# Altium PCB PCB01072018.PcbDoc
Units mm, origin at the board's own origin, x right, y up, seen from the top; angles counter-clockwise.
Board outline 50 x 30 mm, 4 copper layers (Top Layer, GND, VCC, Bottom Layer), stack 0.651 mm thick; 46 components, 32 nets, 228 pads, 48 vias.
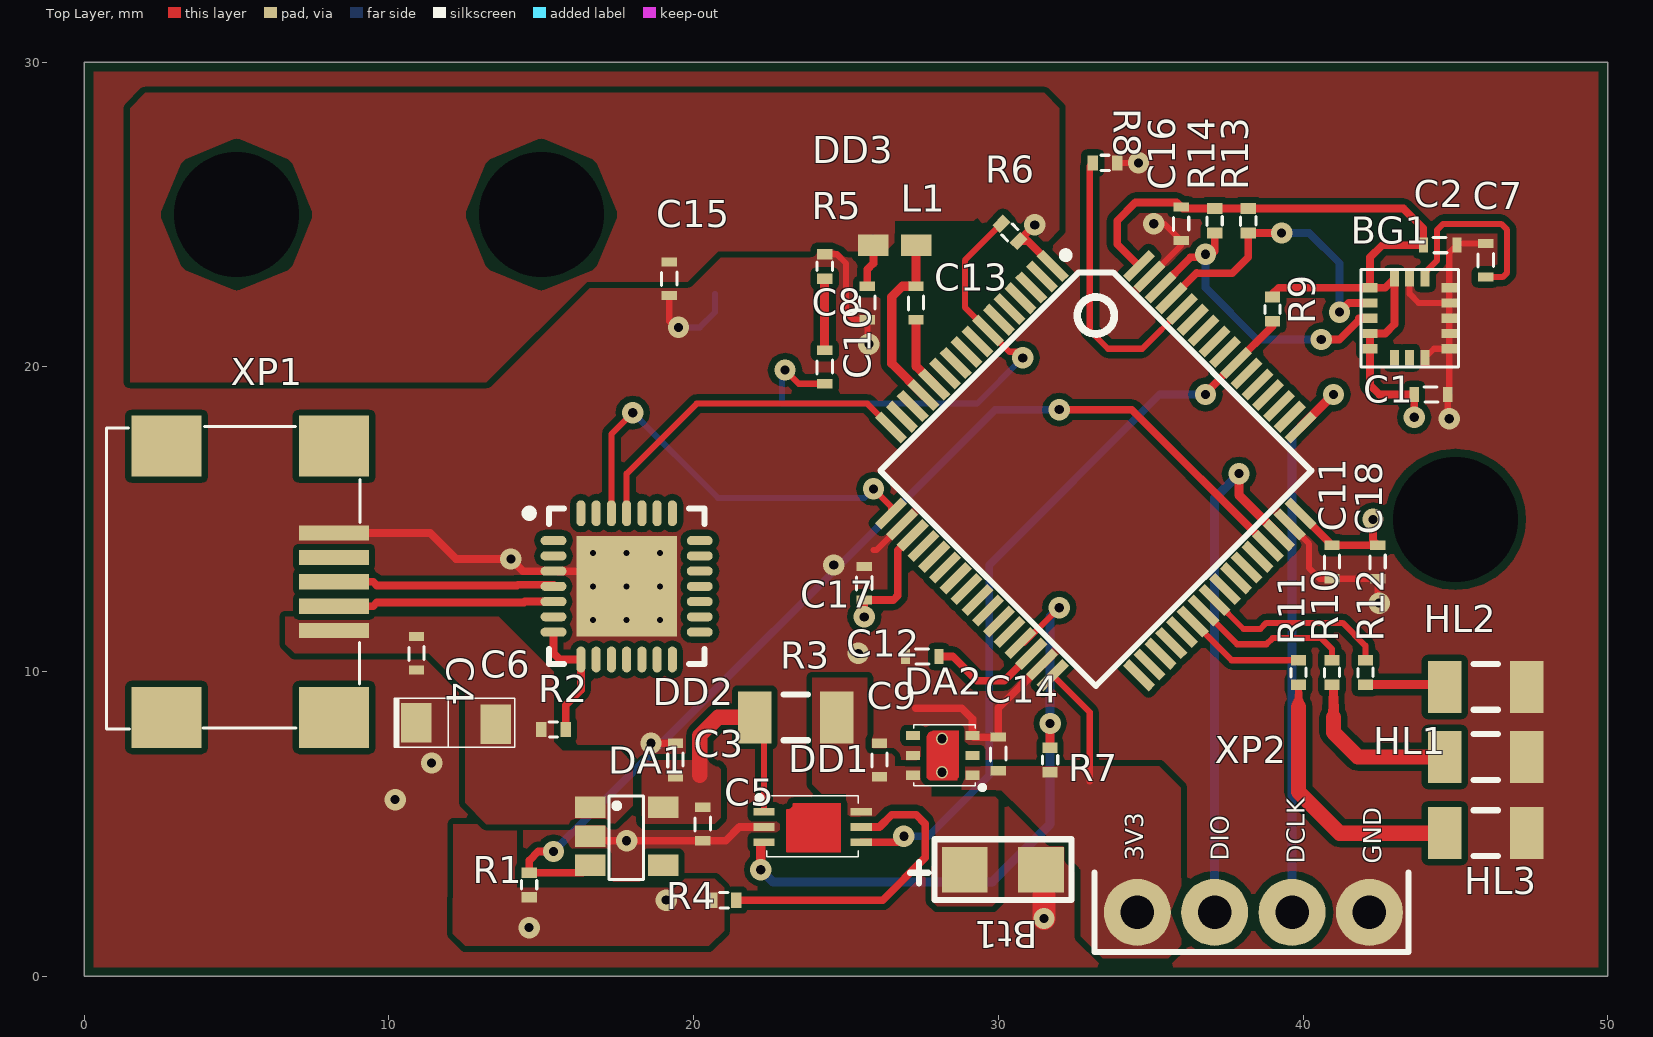
[diagram p0: Top Layer view]
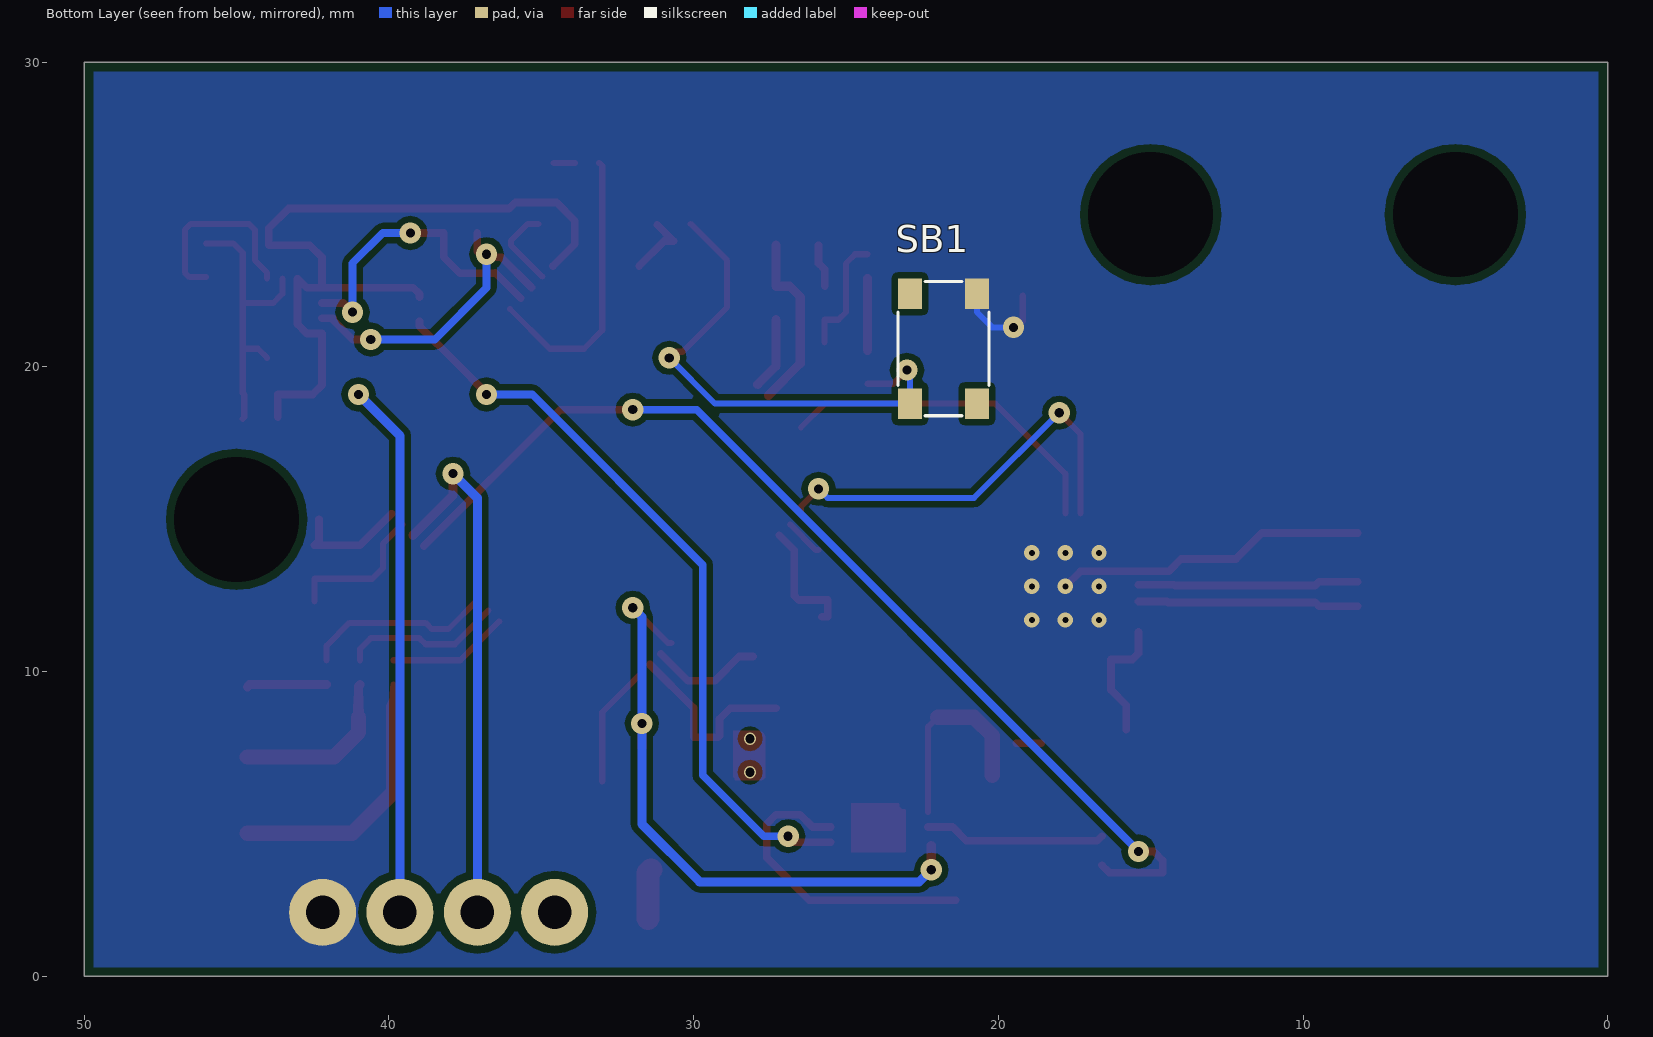
[diagram p1: Bottom Layer view, seen from below]
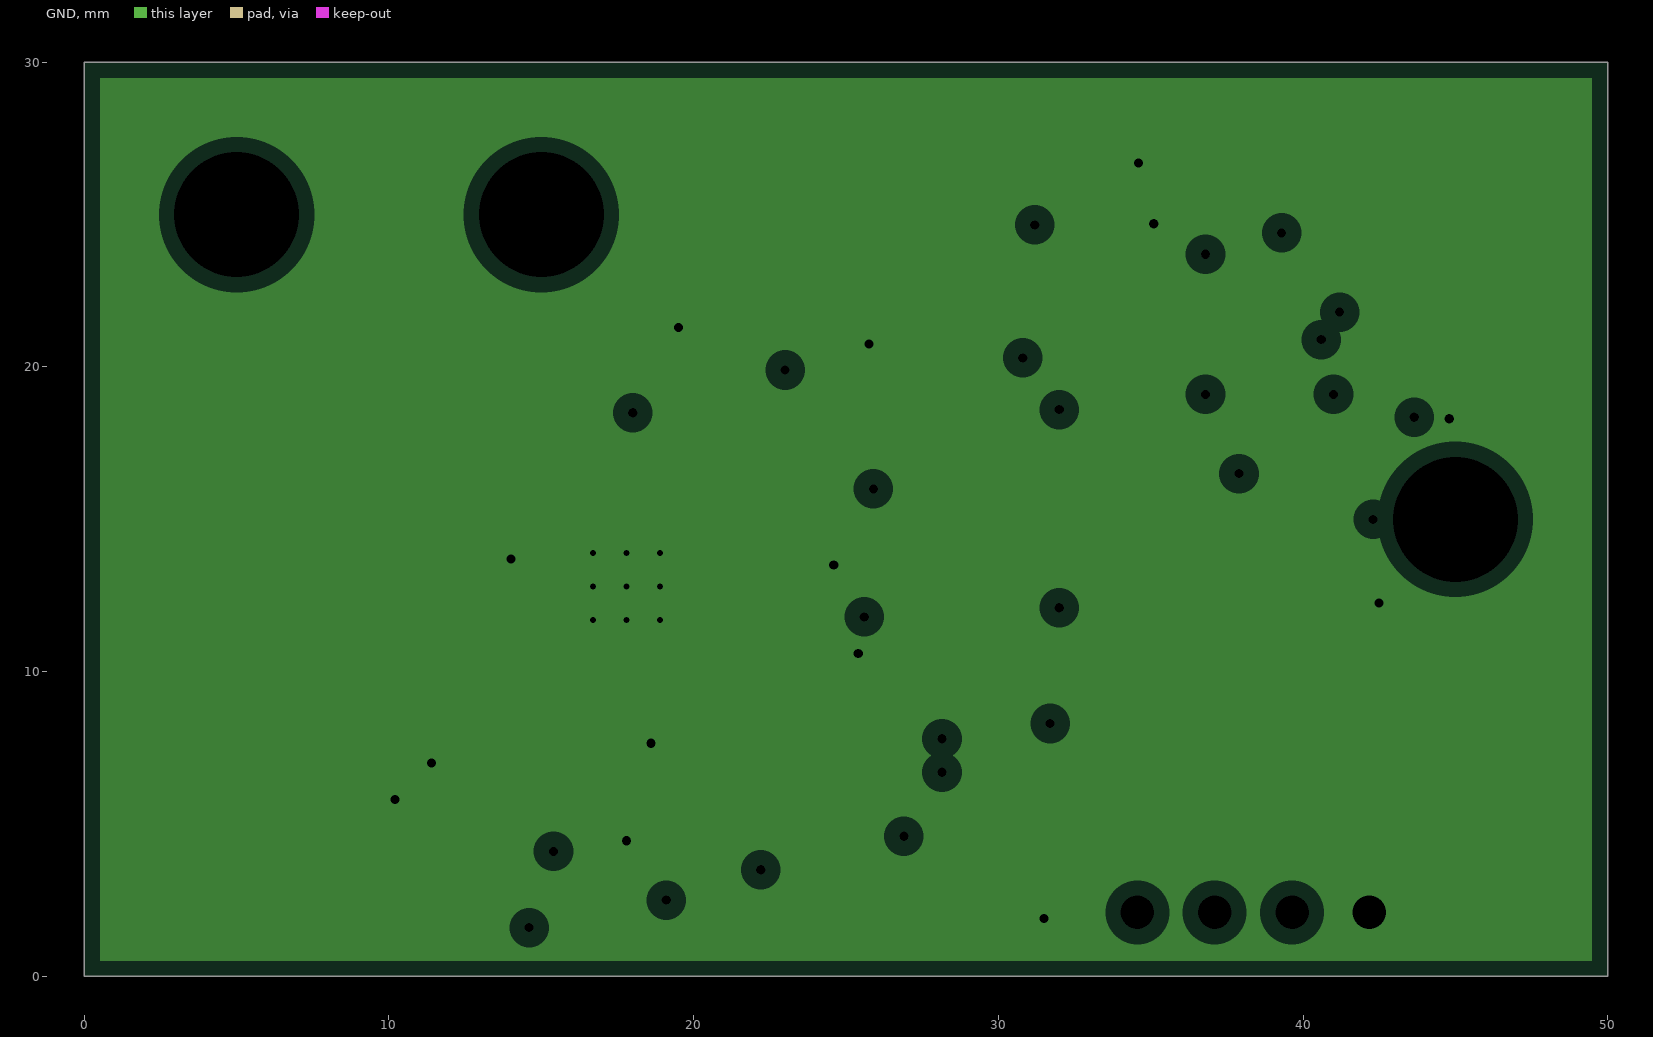
[diagram p2: GND, clearances drawn from the general rule]
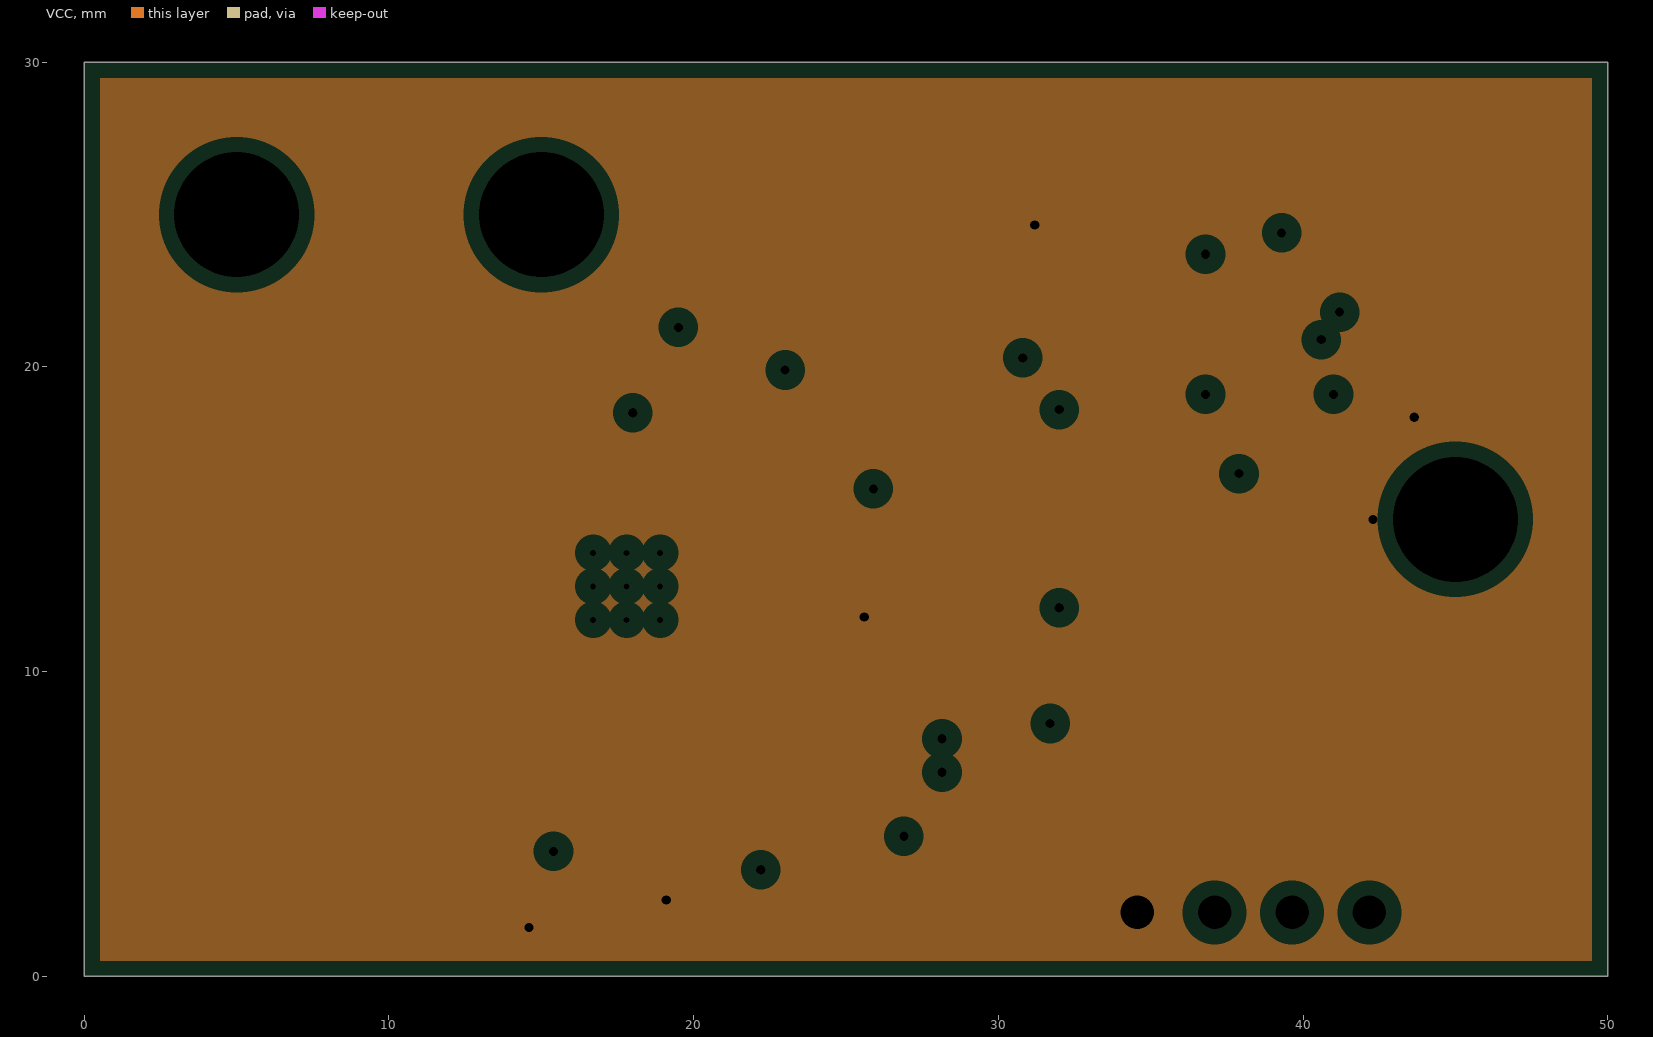
[diagram p3: VCC, clearances drawn from the general rule]

## Layer stack, top to bottom
Top Solder: solder mask 0.0102, Solder Resist, Dk 3.5
Top Layer: signal copper 0.0356
Dielectric 1: prepreg 0.127, FR-4, Dk 4.2
GND: plane copper 0.036, net GND
Dielectric 3: core 0.254, Dk 4.2
VCC: plane copper 0.036, net +3.3V
Dielectric 2: prepreg 0.127, Dk 4.2
Bottom Layer: signal copper 0.0356
Bottom Solder: solder mask 0.0102, Solder Resist, Dk 3.5

## Board outline
0,0 50,0 50,30 0,30

## Design rules (kind name [scope] priority, off if disabled: settings)
BoardOutlineClearance [All] p1: gap=0.3 ignorepadtopadclearanceinfootprint=FALSE
Clearance Clearance_MultiLayerPad [OnLayer('Multi-Layer') and IsPad] p1: gap=0.25 ignorepadtopadclearanceinfootprint=FALSE except(0: Arc-Hole Track-Hole SMDPad-Hole THPad-Hole Via-Hole Fill-Hole Poly-Hole Region-Hole Text-Hole)
Clearance Clearance_Polygon [InPolygon] p2: gap=0.2 ignorepadtopadclearanceinfootprint=FALSE except(0: Arc-Hole Track-Hole SMDPad-Hole THPad-Hole Via-Hole Fill-Hole Poly-Hole Region-Hole Text-Hole)
Clearance [All] p3: gap=0.15 ignorepadtopadclearanceinfootprint=FALSE except(0: Arc-Hole Track-Hole SMDPad-Hole THPad-Hole Via-Hole Fill-Hole Poly-Hole Region-Hole Text-Hole)
DiffPairsRouting [InDifferentialPair('NewDifferentialPairUSB')] p1: maxlimit=0.5 minlimit=0.3 mostfreqgap=0.3 toplayer_minwidth=0.2 toplayer_maxwidth=0.5 toplayer_prefwidth=0.3 bottomlayer_minwidth=0.2 bottomlayer_maxwidth=0.5 bottomlayer_prefwidth=0.3 maxuncoupledlength=12.7
HoleToHoleClearance [All] p1: gap=0.2 allowstackedmicrovias=TRUE
MinimumSolderMaskSliver [All] p1: minsoldermaskwidth=0.2
PlaneClearance [All] p1: clearance=0.5
PlaneConnect [All] p1: planeconnectstyle=Relief reliefexpansion=0.5 reliefentries=4 reliefconductorwidth=0.3 reliefairgap=0.2
PolygonConnect [InNetClass('Power')] p1: connectstyle=Direct reliefconductorwidth=0.254 reliefentries=4 polygonreliefangle="90 Angle" airgapwidth=0.254
PolygonConnect PolygonConnect_PadGND [InNet('GND') and IsPad] p2: connectstyle=Relief reliefconductorwidth=0.5 reliefentries=4 polygonreliefangle="90 Angle" airgapwidth=0.2
PolygonConnect PolygonConnect_Via [IsVia] p3: connectstyle=Direct reliefconductorwidth=0.254 reliefentries=4 polygonreliefangle="90 Angle" airgapwidth=0.254
PolygonConnect PolygonConnect_Digit [InNetClass('Digit')] p4: connectstyle=Relief reliefconductorwidth=0.35 reliefentries=4 polygonreliefangle="90 Angle" airgapwidth=0.2
RoutingVias [All] p1: holewidth=0.3 width=0.7 viastyle="Through Hole" minholewidth=0.3 minwidth=0.7 maxholewidth=0.3 maxwidth=0.7
SilkToSolderMaskClearance [IsPad] p1: minsilkscreentomaskgap=0.2 clearancetoexposedcopper=TRUE
SolderMaskExpansion [All] p1: expansion=0.075
Width [All] p1: maxlimit=10 minlimit=0.15 preferedwidth=0.15
24 further rules are at their usual default settings.

## Classes and differential pairs
net class Power: +3.3V +3.7V +5VUsb AGND AVDD GND NetC3_1 NetC8_2 NetDD1_5 NetDD2_7
net class Digit: Battery_Resourse CHgn D_M D_P INT_LSM6 LED_Power_ON NetDD3_60 NetHL1_1 NetHL2_1 NetHL3_1 RESET SCL_Bat SCL_Sensor SDA_Bat SDA_Sensor SWCLK SWDIO Transmit_Data USART1_RxD USART1_TxD
pad class Power_3V3: C3-1 C3-2 C5-1 C5-2 C9-1 C9-2 C14-1 C14-2 DA1-2 DA1-3 DA1-4 DA1-5 DA2-1 DA2-2 DA2-3 DA2-4 DA2-5 DA2-6 R1-1 R1-2 R3-1 R3-2 R4-1 R4-2
differential pair NewDifferentialPairUSB: +D_P -D_M

## Components (designator, comment, footprint, x,y, rotation, side; value= is the part's Value field where it differs from the comment)
BG1 "LSM6DS0" LGA-16 42.2,21.6 r90 top
Bt1 "X5HW" X5HW 28.9,3.5 r0 top value="3,7 В 1200 мАч"
C1 "0.1 uF" CAP0402_min 44.2,19.1 r0 top
C2 "10uF" CAP0402_min 44.5,24 r0 top
C3 "1 uF" CAP0402_min 19.4,7.1 r90 top
C4 "0.1 uF" CAP0402_min 10.9,10.6 r270 top
C5 "0.1 uF" CAP0402_min 20.3,5 r270 top
C6 "4.7u" "Capasitor Tantal TypeA MIN" 12.2,8.3 r180 top
C7 "0,012uF" CAP0402_min 46,23.5 r90 top
C8 "0.1 uF" CAP0402_min 24.3,20 r90 top
C9 "4.7u" CAP0402_min 26.1,7.1 r90 top
C10 "0.1 uF" CAP0402_min 25.7,22.1 r270 top
C11 "0.1 uF" CAP0402_min 40.95,13.6 r270 top
C12 "0.1 uF" CAP0402_min 27.5,10.5 r180 top
C13 "0.1 uF" CAP0402_min 27.3,22.1 r270 top
C14 "4.7u" CAP0402_min 30,7.3 r90 top
C15 "0.1 uF" CAP0402_min 19.2,22.9 r90 top
C16 "0.1 uF" CAP0402_min 36,24.7 r90 top
C17 "0.1 uF" CAP0402_min 25.6,12.9 r90 top
C18 "0.1 uF" CAP0402_min 42.45,13.6 r270 top
DA1 "MA1555" SOT23-5 16.6,5.55 r270 top
DA2 "TPS78230" WSON-6 29.15,6.6 r90 top value=3V
DD1 "LTC2941IDC" DFN-6 22.306,5.402 r270 top value=5V
DD2 "CP2102" QFN28 17.8,12.8 r0 top
DD3 "STM32F401RE" LQFP-64 33.2,16.6 r315 top
HL1 "TO-1608BC-MRE" LED1206 46,7.2 r0 top value=RED
HL2 "TO-1608BC-PG" LED1206 46,9.5 r0 top value=GREEN
HL3 "TO-1608BC-MRE" LED1206 46,4.7 r0 top value=RED
L1 "220u" LQG15HN15NJ 26.6,24 r0 top
R1 "10k" 0402 14.6,3.4 r270 top
R2 "0" 0402 15,8.1 r0 top
R3 "0.01" 1206 23.35,8.5 r0 top
R4 "10k" 0402 20.6,2.5 r0 top
R5 "100" 0402 24.3,23.7 r270 top
R6 "4.7k" 0402 30.1,24.7 r315 top
R7 "4.7k" 0402 31.7,7.5 r270 top
R8 "10k" 0402 33.9,26.7 r180 top
R9 "4.7k" 0402 39,21.5 r90 top
R10 "470" 0402 40.95,9.575 r90 top
R11 "470" 0402 39.85,9.575 r90 top
R12 "470" 0402 42.05,9.575 r90 top
R13 "4.7k" 0402 38.2,24.4 r90 top
R14 "4.7k" 0402 37.1,24.4 r90 top
SB1 "*" IT-1184 21.8,20.6 r270 bottom
XP1 "USB/M-1J" USB/M-1J 8.2,12.95 r90 top
XP2 "DS-1021-1x4" Connector_STKLink 34.56,2.1 r0 top value=100V

## Footprints (in the part's own frame and the unit in brackets; to place one, negate y for a bottom-side part, rotate by r counter-clockwise, add the part's x,y. Pads: shape width x height; smd on the part's side, far side on the other; paste and mask are expansions set on the pad)
0402 [mm]
  rect 0.35x0.5 smd mask+0.07: 1(0,0) 2(0.8,0)
  silkscreen extent 0.25,-0.25 0.54,0.25, body extent -0.1,-0.25 0.9,0.25, height 0.25
1206 [mm]
  rect 1.1x1.7 smd: 1(-1.35,0) 2(1.35,0)
  silkscreen extent -0.4,-0.75 0.4,0.75, body extent -1.55,-0.83 1.55,0.83, height 0.67
CAP0402_min [mm]
  rect 0.3x0.5 smd mask+0.07: 1(-0.55,0) 2(0.55,0)
  silkscreen extent -0.23,-0.25 0.23,0.25, body extent -0.73,-0.25 0.73,0.25, height 0.51
"Capasitor Tantal TypeA MIN" [mm]
  rect 1x1.3 smd: 1(-1.3,0.025) 2(1.3,-0.025)
  silkscreen extent -1.92,-0.83 2.03,0.77, body extent -1.6,-0.83 1.6,0.78, height 1.61
Connector_STKLink [mm]
  round 2.2 hole 1.1: 1(0,0) 2(2.54,0) 3(5.08,0) 4(7.62,0)
  silkscreen extent -1.4,-1.3 8.9,1.3, body extent -1.24,-1.3 8.92,1.24, height 8.54
DFN-6 [mm] "2mmx3mm"
  rect 0.25x0.7 smd: 1(0,0) 2(0.5,0) 3(1,0) 4(1.002,3.194) 5(0.502,3.194) 6(0.002,3.194)
  Top Layer region: -0.25,1.004 1.299,1.004 1.299,2.504 -0.25,2.504
  Top Layer region: 1.249,0.729 1.238,0.732 1.229,0.739 1.224,0.749 1.224,0.76 1.229,0.77 1.238,0.777 1.249,0.78 1.249,0.78 1.299,0.78 1.309,0.778 1.317,0.772 1.322,0.764 1.324,0.754 1.324,0.754 1.322,0.745 1.317,0.736 1.309,0.731 1.299,0.729 1.299,0.729
  Top Layer region: -0.025,0.775 -0.042,0.861 -0.091,0.934 -0.164,0.983 -0.25,1 -0.25,1 -0.261,0.998 -0.27,0.991 -0.275,0.981 -0.275,0.969 -0.27,0.959 -0.261,0.952 -0.25,0.95 -0.25,0.95 -0.183,0.936 -0.127,0.898 -0.089,0.842 -0.075,0.775 -0.075,0.775 -0.076,0.766 -0.076,0.757 -0.076,0.757 -0.075,0.746 -0.069,0.736 -0.059,0.73 -0.048,0.729 -0.037,0.733 -0.029,0.741 -0.026,0.752 -0.026,0.752 -0.025,0.763 -0.025,0.775
  Top Layer region: -0.25,2.479 -0.261,2.482 -0.27,2.489 -0.275,2.499 -0.275,2.51 -0.27,2.52 -0.261,2.527 -0.25,2.53 -0.25,2.53 1.299,2.53 1.309,2.528 1.317,2.522 1.322,2.514 1.324,2.504 1.324,2.504 1.322,2.495 1.317,2.486 1.309,2.481 1.299,2.479 1.299,2.479
  Top Layer region: -0.275,0.975 -0.275,2.504 -0.273,2.515 -0.266,2.524 -0.256,2.529 -0.244,2.529 -0.234,2.524 -0.227,2.515 -0.225,2.504 -0.225,2.504 -0.225,0.975 -0.227,0.964 -0.234,0.955 -0.244,0.95 -0.256,0.95 -0.266,0.955 -0.273,0.964 -0.275,0.975
  Top Layer region: 1.274,0.754 1.276,0.743 1.283,0.735 1.293,0.73 1.305,0.73 1.315,0.735 1.322,0.743 1.324,0.754 1.324,0.754 1.324,2.504 1.322,2.515 1.315,2.524 1.305,2.529 1.293,2.529 1.283,2.524 1.276,2.515 1.274,2.504 1.274,2.504
  Top Layer region: -0.051,0.729 -0.062,0.732 -0.071,0.739 -0.076,0.749 -0.076,0.76 -0.071,0.77 -0.062,0.777 -0.051,0.78 -0.051,0.78 1.249,0.78 1.259,0.778 1.267,0.772 1.272,0.764 1.274,0.754 1.274,0.754 1.272,0.745 1.267,0.736 1.259,0.731 1.249,0.729 1.249,0.729
  Top Layer region: -0.25,1.004 1.299,1.004 1.299,0.754 1.299,0.754 -0.051,0.754 -0.051,0.844 -0.058,0.877 -0.076,0.904 -0.076,0.904
  silkscreen extent -0.53,-0.19 1.48,3.1, body extent -0.52,0.1 1.48,3.1, height 0.8
IT-1184 [mm] "3x3x1.5"
  rect 1x0.8 smd: 1(-1.8,1.1) 2(1.8,1.1) 3(-1.8,-1.1) 4(1.8,-1.1)
  silkscreen extent -2.2,-1.5 2.2,1.5, body extent -2,-1.25 2,1.25, height 1.4
LED1206 [mm]
  rect 1.1x1.7 smd: 1(-1.35,0) 2(1.35,0)
  silkscreen extent -0.4,-0.75 0.4,0.75, body extent -1.6,-0.8 1.6,0.8, height 1.1
LGA-16 [mm]
  rect 0.3x0.5 smd mask+0.075: 1(1,0) 2(0.5,0) 3(0,0) 4(-0.5,0) 5(-1,0) 9(-1,-2.6) 10(-0.5,-2.6) 11(0,-2.6) 12(0.5,-2.6) 13(1,-2.6)
  rect 0.5x0.3 smd mask+0.075: 6(-1.3,-0.8) 7(-1.3,-1.3) 8(-1.3,-1.8) 14(1.3,-1.8) 15(1.3,-1.3) 16(1.3,-0.8)
  silkscreen extent -1.6,-2.9 1.6,0.3, body extent -1.5,-2.8 1.5,0.2, height 1.01
LQFP-64 [mm] "LQFP, 64-Leads, Body 10,30x10,30mm, Pitch 0,50mm, IPC Medium Density"
  rect 1.2x0.3 smd mask+0.075: 1(-5.75,3.75) 2(-5.75,3.25) 3(-5.75,2.75) 4(-5.75,2.25) 5(-5.75,1.75) 6(-5.75,1.25) 7(-5.75,0.75) 8(-5.75,0.25) 9(-5.75,-0.25) 10(-5.75,-0.75) 11(-5.75,-1.25) 12(-5.75,-1.75) 13(-5.75,-2.25) 14(-5.75,-2.75) 15(-5.75,-3.25) 16(-5.75,-3.75) 33(5.75,-3.75) 34(5.75,-3.25) 35(5.75,-2.75) 36(5.75,-2.25) 37(5.75,-1.75) 38(5.75,-1.25) 39(5.75,-0.75) 40(5.75,-0.25) 41(5.75,0.25) 42(5.75,0.75) 43(5.75,1.25) 44(5.75,1.75) 45(5.75,2.25) 46(5.75,2.75) 47(5.75,3.25) 48(5.75,3.75)
  rect 0.3x1.2 smd mask+0.075: 17(-3.75,-5.75) 18(-3.25,-5.75) 19(-2.75,-5.75) 20(-2.25,-5.75) 21(-1.75,-5.75) 22(-1.25,-5.75) 23(-0.75,-5.75) 24(-0.25,-5.75) 25(0.25,-5.75) 26(0.75,-5.75) 27(1.25,-5.75) 28(1.75,-5.75) 29(2.25,-5.75) 30(2.75,-5.75) 31(3.25,-5.75) 32(3.75,-5.75) 49(3.75,5.75) 50(3.25,5.75) 51(2.75,5.75) 52(2.25,5.75) 53(1.75,5.75) 54(1.25,5.75) 55(0.75,5.75) 56(0.25,5.75) 57(-0.25,5.75) 58(-0.75,5.75) 59(-1.25,5.75) 60(-1.75,5.75) 61(-2.25,5.75) 62(-2.75,5.75) 63(-3.25,5.75) 64(-3.75,5.75)
  silkscreen extent -5.8,-5 5,5, body extent -5.89,-5.89 5.89,5.89, height 1.55
LQG15HN15NJ [mm]
  rect 1x0.7 smd: 1(-0.7,0) 2(0.7,0)
  body extent -0.73,-0.25 0.73,0.25, height 0.51
QFN28 [mm] "5x5x0.5mm"
  oval 0.85x0.3 smd: 1(-2.4,1.5) 2(-2.4,1) 3(-2.4,0.5) 4(-2.4,0) 5(-2.4,-0.5) 6(-2.4,-1) 7(-2.4,-1.5) 15(2.4,-1.5) 16(2.4,-1) 17(2.4,-0.5) 18(2.4,0) 19(2.4,0.5) 20(2.4,1) 21(2.4,1.5)
  rect 3.3x3.3 smd: 3(0,0)
  oval 0.3x0.85 smd: 8(-1.5,-2.4) 9(-1,-2.4) 10(-0.5,-2.4) 11(0,-2.4) 12(0.5,-2.4) 13(1,-2.4) 14(1.5,-2.4) 22(1.5,2.4) 23(1,2.4) 24(0.5,2.4) 25(0,2.4) 26(-0.5,2.4) 27(-1,2.4) 28(-1.5,2.4)
  rect 0x0 smd: 29(-0.85,0) 30(-0.35,0) 31(0,0.85) 32(0,0.35) 33(0.85,0) 34(0.35,0) 35(0,-0.85) 36(0,-0.35)
  silkscreen extent -3.32,-2.55 2.55,2.55, body extent -2.5,-2.5 2.5,2.5, height 1
SOT23-5 [mm]
  rect 0.7x1 smd mask+0.05: 1(0,0) 2(0.95,0) 3(1.9,0) 4(1.9,2.4) 5(0,2.4)
  silkscreen extent -0.38,0.63 2.37,1.75, body extent -0.5,-0.05 2.5,2.45, height 1.05
USB/M-1J [mm]
  rect 0.5x2.3 smd mask+0.05: 1(-1.6,0) 2(-0.8,0) 3(0,0) 4(0.8,0) 5(1.6,0)
  rect 2x2.3 smd mask+0.05: -(-4.45,0) -(-4.45,5.5) -(4.45,0) -(4.45,5.5)
  silkscreen extent -4.82,-0.85 5.1,7.47, body extent -4.8,-0.82 5.1,8.42, height 3.93
WSON-6 [mm]
  rect 0.3x0.45 smd mask+0.07: 1(0,0) 2(0.65,0) 3(1.3,0) 4(1.3,1.95) 5(0.65,1.95) 6(0,1.95)
  Top Layer region: -0.062,0.45 -0.107,0.487 -0.162,0.5 -0.162,0.5 -0.162,1.375 -0.146,1.438 -0.1,1.483 -0.037,1.5 -0.037,1.5 1.227,1.5 1.345,1.468 1.431,1.381 1.463,1.262 1.463,1.262 1.462,0.45
  silkscreen extent -0.42,-0.35 1.65,1.92, body extent -0.35,-0.1 1.65,1.92, height 0.8
X5HW [mm]
  rect 1.5x1.5 smd: 1(0,0) 2(2.5,0)
  silkscreen extent -1.8,-1 3.5,1

## Part data
BG1: "IMEMO", Documentation=https://www.st.com/resource/en/datasheet/lsm6ds0.pdf, Part Number=LSM6DS0
C1 C4 C5 C8 C10 C11 C12 C13 C15 C16 C17 C18: library part Capasitor, Manufacturer=TDK, Package=0402, Part Number=C1005X7R1H104KT000F, Voltage=50V, Price=0,15, Quantity=50, ShoppingPlace=http://belchip.by/product/?selected_product=33981
C2: library part Capasitor, Manufacturer="Murata Manufacturing", Package=0402, Part Number=GRM1535C1H100J, Voltage=50V, Price=0,02, Quantity=50, ShoppingPlace=https://www.ru-chipdip.by/product/grm1535c1h100j
C3: library part Capasitor, Manufacturer="Murata Manufacturing", Package=0402, Part Number=GRM155R61A105KE15B, Voltage=10V, Price=0,035, Quantity=50, ShoppingPlace=https://www.ru-chipdip.by/product/grm155r61a105k
C6: library part "Capasitor Electrolit", Manufacturer=China, Package="Type A", Part Namber=TECAP4.7/16VA10, Power=16V, Price=0.16, ShoppingPlace=https://www.ru-chipdip.by/product0/850917081
C7: library part Capasitor, Manufacturer="Murata Manufacturing", Package=0402, Part Number=GRM155R71H123K, Voltage=50V, Price=0,02, Quantity=50, ShoppingPlace=https://www.ru-chipdip.by/product/grm155r71h123k
C9 C14: library part Capasitor, Manufacturer="Murata Manufacturing", Package=0402, Part Number=GRM2165C1H4R7CD01D, Voltage=50V, Price=0,035, Quantity=50, ShoppingPlace=https://www.ru-chipdip.by/product/grm2165c1h4r7c
DA1: library part MAX1555, Manufacturer="Maxim Integrated Products", Package=SOT-23-5, Part Number=MAX1555EZK+T, Price=1, Quantity=1, ShoppingPlace=http://belchip.by/product/?selected_product=06393
DA2: Manufacturer="Texas Instruments", Package=SOT-23-6, Part Number=TSOT23-5, Price=1.58, Quantity=1, ShoppingPlace=https://www.digikey.com/product-detail/en/texas-instruments/TPS78230DDCR/296-24372-2-ND/2051745
DD1: Manufacturer="RoHS Compliant", Package=6-DFN, Part Number=LTC2941IDC, Price=1.58, Quantity=1, ShoppingPlace=https://www.digikey.com/product-detail/en/linear-technology-analog-devices/LTC1754ES6-5-TRMPBF/LTC1754ES6-5-TRMPBFTR-ND/962607
DD2: "USB/USART Converter", Manufacture="Silicon Labs", Documentation=https://www.silabs.com/documents/public/data-sheets/CP2102-9.pdf, Packge=QFN-28, Part Number=CP2102
DD3: Manufacturer="STM MicroElectronics", Documentation=http://www.keil.com/dd/docs/datashts/st/stm32f4xx/dm00102166.pdf, Part Number=STM32F401RE, Price=12, Quantity=1
HL1 HL3: library part LED, Manufacturer="Taiwan Oasis Technology Co", Package=1608, Part Number=TO-1608BC-MRE, Price=0.03, Quantity=10, Shopping Place=https://www.ru-chipdip.by/product/to-1608bc-mre
HL2: library part LED, Manufacturer="Taiwan Oasis Technology", Package=1608, Part Number=TO-1608BC-PG, Price=0.03, Quantity=10, Shopping Place=https://www.ru-chipdip.by/product/to-1608bc-pg
L1: library part Inductor, Manufacturer=Bourns, Package=1812, Part Number=CM453232-221KL, Price=0.225, Quantity=2, ShoppingPlace=https://www.ru-chipdip.by/product/cm453232-221kl
R1 R4 R8: library part Resistor, Manufacturer=Тайвань, Package=0402, Part Number=RC0402FR-0710KL, Power=0.062W, Price=0,015, Quntity=50
R2: library part Resistor, Manufacturer=Тайвань, Package=0402, Part Number=RC0402JR-070RL, Power=0.062W, Price=0.015, Quntity=50, ShoppingPlace=https://www.ru-chipdip.by/product0/9000189662
R3: library part Resistor, Manufacturer=China, Package=1206, Part Number=120600R1, Power=0.75W, Price=4, Quntity=50, ShoppingPlace=https://ru.aliexpress.com/item/Power-Adapter-Chip-Resistors-1206-0-01R-0-01-ohms-R010-100pcs/32834259073.html?spm=a2g0v.search0604.3.249.2a2b60c7NBGyXV&ws_ab_test=searchweb0_0,searchweb201602_3_10152_10151_10065_10344_10068_10342_10343_10340_10341_10696_10084_5722520_10083_5711520_10618_10307_10059_5722620_5722920_5722720_5722820_100031_5711420_10103_524_10624_10623_10622_10621_10620_10125,searchweb201603_6,ppcSwitch_5&algo_expid=fa6d5ed5-cdca-4e44-a6e1-815c4b4f7787-37&algo_pvid=fa6d5ed5-cdca-4e44-a6e1-815c4b4f7787&transAbTest=ae803_2&priceBeautifyAB=0
R5: library part Resistor, Manufacturer=Тайвань, Package=0402, Part Number=RC0603FR-07100RL, Power=0.062W, Price=0.03, Quntity=50, ShoppingPlace=https://www.ru-chipdip.by/product0/9000079616
R6 R7 R9 R13 R14: library part Resistor, Manufacturer=Тайвань, Package=0402, Part Number=RC0402JR-074K7L, Power=0.062W, Price=0.03, Quntity=50, ShoppingPlace=https://www.ru-chipdip.by/product0/9000189640
R10 R11 R12: library part Resistor, Manufacturer=Тайвань, Package=0402, Part Number=RC0805FR-07470RL, Power=0,062W, Price=0,015, Quntity=50, ShoppingPlace=https://www.ru-chipdip.by/product0/9000079478
SB1: library part Button
XP1: library part USB-M-1J, Manufacturer=ESB, Package="ESB 22 SERIES", Part Number=USB/M-1J, Price=2, Quantity=1, ShoppingPlace=http://belchip.by/product/?selected_product=07369
XP2: library part Connector_STKLink, Manufacturer="Ningbo connfly electronic", Package=DS-1021, Part Number=DS-1021-1x4, Price=0,09, Quantity=10, ShoppingPlace=https://www.ru-chipdip.by/product/pls-4
Bt1: Quantity=https://ru.aliexpress.com/item/3-7-1200-Lipo/32852574199.html?spm=a2g0v.search0604.3.181.2111fc08nULavV&ws_ab_test=searchweb0_0%2Csearchweb201602_3_10152_10151_10065_10344_10068_10342_10343_10340_10341_10696_10084_5722520_10083_5711520_10618_10307_10059_5722620_5722920_306_5722720_5722820_100031_5711420_10103_10624_10623_10622_10621_10620_10125%2Csearchweb201603_31%2CppcSwitch_5&algo_expid=a7204690-5c98-48fe-b8bb-b8922ec76835-26&algo_pvid=a7204690-5c98-48fe-b8bb-b8922ec76835&transAbTest=ae803_2&priceBeautifyAB=0

## Free pads (board coordinates)
  round 1.524 hole 4.1: -(5,25) -(15,25) -(45,15)

## Via types
v1: diameter 0.7, hole 0.3, Top Layer to Bottom Layer, tented both sides, 17 vias
v2: diameter 0.7, hole 0.3, Top Layer to GND, tented top, 13 vias
v3: diameter 0.5, hole 0.2, Top Layer to Bottom Layer, 9 vias
v4: diameter 0.7, hole 0.3, Top Layer to VCC, tented top, 6 vias
v5: diameter 0.4, hole 0.3, Top Layer to Bottom Layer, tented both sides, 2 vias
v6: diameter 0.7, hole 0.3, Top Layer to Bottom Layer, tented top, 1 vias

## Nets (pads, with @x,y where several pads share a name; then routed paths per layer and width w, separated by ;. In a path a pad name is that pad's centre, name@x,y a point inside that pad or via, vN(x,y) a via of type N, cw(c..) or ccw(c..) an arc to the next point about the centre after c; other vN are vias at no path point)
+3.3V: BG1.1 BG1.4 BG1.5 BG1.16 C1.1 C2.1 C10.1 C11.1 C14.1 C15.2 C16.2 C17.1 C18.1 DA2.1 DD3.1 DD3.19 DD3.32 DD3.48 DD3.64 L1.1 R1.2 R4.1 R6.2 R7.2 R9.2 R13.2 R14.2 XP2.1 | length 42.2
  Top Layer w0.2: DD3.32 33,8.668 33,6.4
  Top Layer w0.254: C10.1 25.7,23.2 25.9,23.4 L1.1 ; v4@25.8,11.8 v4(25.6,11.8) C17.1 26.55,12.35 26.7,12.5 26.7,13.989 DD3.19 ; v4(31.196,24.665) R6.2 30.969,24.134 DD3.1 ; DD3.64 33.9,24.032 33.9,24.8 34.5,25.4 35.85,25.4 C16.2 36.05,25.2 R14.2 R13.2 43.3,25.2 43.95,24.55 C2.1 42.6,24 42.2,23.6 BG1.1 ; R9.2 39,22.4 39.2,22.6 BG1.1 ; DD3.48 40.95,14.153 C11.1 C18.1 42.3,14.3 v4(42.3,15) ; v4(43.65,18.35) C1.1 42.5,19.1 42.2,19.4 BG1.5 BG1.4 42.7,21.1 43,21.4 BG1.16 42.7,22.6 BG1.1
  other v4: 14.6,1.6 19.1,2.5
+3.7V: Bt1.1 C9.1 DA2.6 DD1.6 R3.2
+5VUsb: C4.1 C6.1 DA1.1 R2.1 XP1.1
AGND: C13.2 DD3.12 | length 2.4
  Top Layer w0.3: C13.2 27.3,20.025 DD3.12
AVDD: C13.1 DD3.13 L1.2 | length 6
  Top Layer w0.3: L1.2 C13.1 26.85,22.65 26.5,22.3 26.5,20.118 DD3.13
Battery_Resourse: DD3.39 R10.2 | length 5.3
  Top Layer w0.2: DD3.39 37.839,10.9 38.8,10.9 39,11.1 40.6,11.1 40.95,10.75 R10.2
CHgn: DA1.3 DD3.45 R1.1 | length 34.7
  Top Layer w0.254: v1(15.4,4.1) 14.9,4.1 14.6,3.8 R1.1 16.35,3.4 DA1.3 ; v1(32,18.6) 34.382,18.6 DD3.45
  Bottom Layer w0.254: v1(15.4,4.1) 29.9,18.6 v1(32,18.6)
D_M: DD2.5 XP1.2 | length 7.3
  Top Layer w0.254: XP1.2 9.477,12.15 9.6,12.273 14.429,12.273 14.456,12.3 DD2.5
D_P: DD2.4 XP1.3 | length 7.3
  Top Layer w0.254: XP1.3 9.477,12.95 9.6,12.827 14.2,12.827 14.227,12.854 DD2.4@15.4,12.854
GND: BG1.8 BG1.9 BG1.10 BG1.11 BG1.12 BG1.13 BG1.15 Bt1.2 C1.2 C2.2 C3.2 C4.2 C5.2 C6.2 C7.2 C9.2 C10.2 C11.2 C12.2 C14.2 C15.1 C16.1 C17.2 C18.2 DA1.2 DA2.3 DA2.5 DD1.2 DD2.3 DD3.18 DD3.31 DD3.47 DD3.63 HL1.2 HL2.2 HL3.2 R5.1 R8.1 SB1.1 XP1.5 XP2.4 | length 51.6
  Top Layer w0.2: C15.1 19.2,21.5 19.4,21.3 v6(19.5,21.3) ; R5.1 24.7,23.7 25,23.4 25,21.8 25.25,21.55 C10.2 v2@25.7,20.8 ; 25.9,14 26.004,14 DD3.18 ; R8.1 v2(34.6,26.7) ; DD3.63 36,23.996 C16.1 35.45,24.7 v2(35.1,24.7) ; DD3.47 40.2,14.196 40.2,13.4 40.55,13.05 C11.2 C18.2 v2@42.45,12.3 ; BG1.15 43.5,22.4 43.8,22.1 BG1.12 ; BG1.8 44.3,20.6 BG1.9 ; v2(44.8,18.3) 44.75,18.35 C1.2 44.8,19.15 BG1.9 ; C7.2 45.1,24.05 C2.2 44.8,23.75 BG1.13 BG1.12 ; BG1.9 BG1.10 BG1.11 BG1.12
  Top Layer w0.254: XP1.5 11.35,14.55 12.2,13.7 v2(14,13.7) 14.4,13.3 15.4,13.3 17.3,13.3 v3(17.8,12.8) ; DA1.2 16.75,4.45 v2(17.8,4.45) C5.2 21.05,4.45 21.502,4.902 DD1.2 ; v2(18.6,7.65) C3.2 ; 27.3,8.8 28.8,8.8 29.15,8.45 DA2.3 29.2,7.85 C14.2 30,8.804 DD3.31
  Top Layer w0.75: Bt1.2 31.5,3.4 v2(31.5,1.9)
  Bottom Layer w0.2: v6(19.5,21.3) 20.2,21.3 20.7,21.8 SB1.1
  other v2: 10.2,5.8 11.4,7 25.4,10.6 42.5,12.25 24.6,13.5 25.75,20.75
  other v3: 16.7,11.7 17.8,11.7 18.9,11.7 16.7,12.8 18.9,12.8 16.7,13.9 17.8,13.9 18.9,13.9
INT_LSM6: BG1.7
LED_Power_ON: DD3.40 R12.2 | length 6.2
  Top Layer w0.2: DD3.40 38.046,11.4 38.6,11.4 38.8,11.6 41.3,11.6 42.05,10.85 R12.2
NetBG1_14: BG1.14 C7.1 | length 6.4
  Top Layer w0.2: BG1.14 44,23.1 44.4,23.5 44.4,24.5 44.6,24.7 46.5,24.7 46.7,24.5 46.7,23.1 46.55,22.95 C7.1
NetC3_1: C3.1 C5.1 DA1.5 DD1.1 R3.1 | length 6.6
  Top Layer w0.2: R3.1 22.306,8.194 DD1.1
  Top Layer w0.5: 20.2,6.6 20.2,7.9 20.8,8.5 R3.1
NetC8_2: C8.2 R5.2 | length 2.4
  Top Layer w0.3: C8.2 R5.2
NetC12_1: C12.1 DD3.30 | length 3.7
  Top Layer w0.254: C12.1 28.5,10.5 29.3,9.7 30.189,9.7 DD3.30
NetDD1_5: DD1.5 R4.2 | length 10.3
  Top Layer w0.254: R4.2 26.2,2.5 27.6,3.9 27.6,5 27.3,5.3 26.5,5.3 26.1,4.9 DD1.5
NetDD2_7: DD2.7 DD2.8 R2.2 | length 4.2
  Top Layer w0.254: DD2.7 15.4,10.6 15.6,10.4 DD2.8 16.3,9.4 15.8,8.9 R2.2
NetDD3_60: DD3.60 R8.2 | length 9.4
  Top Layer w0.2: R8.2 33,26.6 33,21.2 33.6,20.6 34.725,20.6 DD3.60
NetHL1_1: HL1.1 R10.1 | length 5.6
  Top Layer w0.3: R10.1 41,9.525 41,8.5
  Top Layer w0.5: 41,8.5 41,8 41.8,7.2 HL1.1
NetHL2_1: HL2.1 R12.1 | length 2.6
  Top Layer w0.3: R12.1 44.575,9.575 HL2.1
NetHL3_1: HL3.1 R11.1 | length 8.9
  Top Layer w0.2: 39.85,8.85 R11.1
  Top Layer w0.5: 39.85,8.85 39.85,6.05 41.2,4.7 HL3.1
RESET: C8.1 DD3.7 R6.1 SB1.4 | length 17
  Top Layer w0.2: v1(23,19.9) 23.45,19.45 C8.1 ; R6.1 28.9,23.5 28.9,21.961 DD3.7 30.361,20.5 30.6,20.5 v1(30.8,20.3)
  Bottom Layer w0.2: v1(23,19.9) 23,19.7 22.9,19.6 SB1.4 29.3,18.8 v1(30.8,20.3)
SCL_Bat: DD1.3 DD3.29 R7.1 | length 21
  Top Layer w0.2: DD3.29 30.843,10.943 v1(32,12.1)
  Top Layer w0.3: v1(22.2,3.5) DD1.3@22.2,4.296 ; R7.1 v1(31.7,8.3)
  Bottom Layer w0.3: v1(22.2,3.5) 22.6,3.1 29.8,3.1 31.7,5 v1(31.7,8.3) 31.7,11.8 v1(32,12.1)
SCL_Sensor: BG1.2 DD3.61 R13.1 | length 10
  Top Layer w0.254: DD3.61 36.516,23.098 36.54,23.073 37.673,23.073 38.2,23.6 R13.1 v1(39.3,24.4) ; v1(41.2,21.8) 41.5,22.1 BG1.2
  Bottom Layer w0.254: v1(39.3,24.4) 40.2,24.4 41.2,23.4 v1(41.2,21.8)
SDA_Bat: DD1.4 DD3.55 R9.1 | length 24.7
  Top Layer w0.254: DD1.4 26.7,4.4 v1(26.9,4.6) ; v1(36.8,19.1) 36.8,19.139 DD3.55 39,21.339 R9.1
  Bottom Layer w0.254: v1(26.9,4.6) 27.7,4.6 29.7,6.6 29.7,13.5 35.3,19.1 v1(36.8,19.1)
SDA_Sensor: BG1.3 DD3.62 R14.1 | length 10.4
  Top Layer w0.254: DD3.62 36.311,23.6 36.9,23.6 37.1,23.8 R14.1 ; v1(40.6,20.9) 41.187,20.9 41.827,21.54 41.827,21.6 BG1.3
  Bottom Layer w0.254: v1(36.8,23.7) 36.8,22.6 38.5,20.9 v1(40.6,20.9)
SWCLK: DD3.49 XP2.3 | length 19.1
  Top Layer w0.3: DD3.49 39.918,18.018 v1(41,19.1)
  Bottom Layer w0.3: XP2.3 39.64,17.74 v1(41,19.1)
SWDIO: DD3.46 XP2.2 | length 17.3
  Top Layer w0.3: v1(37.9,16.5) 37.9,15.789 DD3.46
  Bottom Layer w0.3: XP2.2 37.1,15.7 v1(37.9,16.5)
Transmit_Data: DD3.38 R11.2 | length 4
  Top Layer w0.2: DD3.38 37.657,10.375 R11.2
USART1_RxD: DD2.25 DD3.16 | length 11.3
  Top Layer w0.2: DD2.25 17.8,16.5 20.1,18.8 25.697,18.8 DD3.16
USART1_TxD: DD2.26 DD3.17 | length 13.8
  Top Layer w0.2: DD2.26 17.3,17.8 v1(18,18.5) ; v1(25.9,16) 26.482,15.418 DD3.17
  Bottom Layer w0.2: v1(18,18.5) 20.8,15.7 25.6,15.7 v1(25.9,16)
pads on no net: BG1.6 DA1.4 DA2.2 DA2.4 DD2.1 DD2.2 DD2.6 DD2.9 DD2.10 DD2.11 DD2.12 DD2.13 DD2.14 DD2.15 DD2.16 DD2.17 DD2.18 DD2.19 DD2.20 DD2.21 DD2.22 DD2.23 DD2.24 DD2.27 DD2.28 DD2.29 DD2.30 DD2.31 DD2.32 DD2.33 DD2.34 DD2.35 DD2.36 DD3.2 DD3.3 DD3.4 DD3.5 DD3.6 DD3.8 DD3.9 DD3.10 DD3.11 DD3.14 DD3.15 DD3.20 DD3.21 DD3.22 DD3.23 DD3.24 DD3.25 DD3.26 DD3.27 DD3.28 DD3.33 DD3.34 DD3.35 DD3.36 DD3.37 DD3.41 DD3.42 DD3.43 DD3.44 DD3.50 DD3.51 DD3.52 DD3.53 DD3.54 DD3.56 DD3.57 DD3.58 DD3.59 SB1.2 SB1.3 XP1.4 XP1.-
copper on no net:
  other v5: 28.15,6.7 28.15,7.8

## Polygon pours and split planes (outlines as drawn)
GND on Bottom Layer "Top Layer-No Net1" (solid, remove dead copper, pour order 25): 0,0 50,0 50,30 0,30
+3.3V on Top Layer "Top Overlay-No Net" (solid, remove dead copper, pour order 20): 1.5,19.5 1.5,28.5 2,29 31.5,29 32,28.5 32,24.5 31.634,24.134 30.066,24.134 29.3,24.9 29.2,24.8 26.6,24.8 26.6,24.1 26.3,23.8 20.8,23.8 19.8,22.8 16.5,22.8 13.2,19.5
+3.3V on Top Layer "Top Overlay-No Net" (solid, remove dead copper, pour order 16): 28.8,6.1 30.1,6.1 32.7,3.5 32.7,1.3 33.4,0.6 35.6,0.6 36,1 36,6.2 35.3,6.9 28.8,6.9
+3.3V on Top Layer "Top Overlay-No Net" (solid, remove dead copper, pour order 10): 12.1,5 12.1,1.4 12.5,1 20.5,1 21,1.5 21,2.9 20.7,3.2 19.7,3.2 19.4,2.9 14.2,2.9 14.2,4.8 14,5
GND on Top Layer "Top Overlay-No Net" (solid, remove dead copper, pour order 8): 1.2,10.5 11.4,10.5 11.9,10 11.9,2.6 10.3,1 1.2,1
+5VUsb on Top Layer "Top Overlay-No Net" (solid, remove dead copper, pour order 2): 6.6,11.8 6.6,10.9 6.9,10.6 11.3,10.6 12.5,9.4 12.5,5.7 13.2,5 17.4,5 18,5.6 18,7 17.6,7.4 15.7,7.4 15.4,7.7 15.4,10 13.6,11.8 10.1,11.8
+3.7V on Top Layer "Top Overlay-No Net" (solid, remove dead copper, pour order 12): 25.1,6.9 25,6.8 25,5.2 25.1,5.1 25.9,5.1 26.4,5.6 27.5,5.6 27.8,5.3 27.8,2.5 28,2.3 29.8,2.3 30,2.5 30,5.8 29.9,5.9 27.8,5.9 27.8,6.8 27.7,6.9
+3.7V on Top Layer "Top Overlay-No Net" (solid, remove dead copper, pour order 14): 23.9,9.8 23.9,6.3 24.2,6 26.3,6 26.6,6.3 26.6,7.1 26.6,7.2 26.5,7.3 26.1,7.3 25.7,7.7 25.7,9.8
GND on Top Layer "Top Overlay-No Net" (solid, remove dead copper, pour order 18): 27.6,7 27.478,6.878 26.822,6.878 26.8,6.9 25.8,6.9 25.4,7.3 25.4,9.8 25,10.2 22,10.2 21,11.2 21,13.7 21.9,14.6 25.6,14.6 26.3,13.9 26.3,13 26,12.7 25.2,12.7 25,12.5 25,11.7 25.3,11.4 27.6,11.4
NetC3_1 on Top Layer "Top Overlay-No Net" (solid, remove dead copper, pour order 6): 18.3,7 18.3,5.1 18.4,5 20.7,5 20.9,5.2 20.9,6.8 20.6,7.1 18.4,7.1
GND on Top Layer "Top Layer-No Net" (solid, remove dead copper, pour order 24): 0,0 50,0 50,30 0,30
GND on GND (split plane): 49.49,0.51 0.51,0.51 0.51,29.49 49.49,29.49
+3.3V on VCC (split plane): 49.49,0.51 0.51,0.51 0.51,29.49 49.49,29.49

## Silkscreen, mask and mechanical layers (free items; w line width, h text height)
Board:
  the board outline again, w0.254

## Dimensions
0,30 to 50,30 on Size
50,0 to 50,30 on Size

## Text inside footprints (layer, text, board x,y; h text height)
XP2: Top Overlay "3V3" at 34.96,3.8 h1 r90; Top Overlay "DIO" at 37.76,3.8 h1 r90; Top Overlay "DCLK" at 40.26,3.7 h1 r90; Top Overlay "GND" at 42.76,3.7 h1 r90